# EAGLE board SparkFun_MIDI_Shield_Panel_v15 (EAGLE 7.3.0)
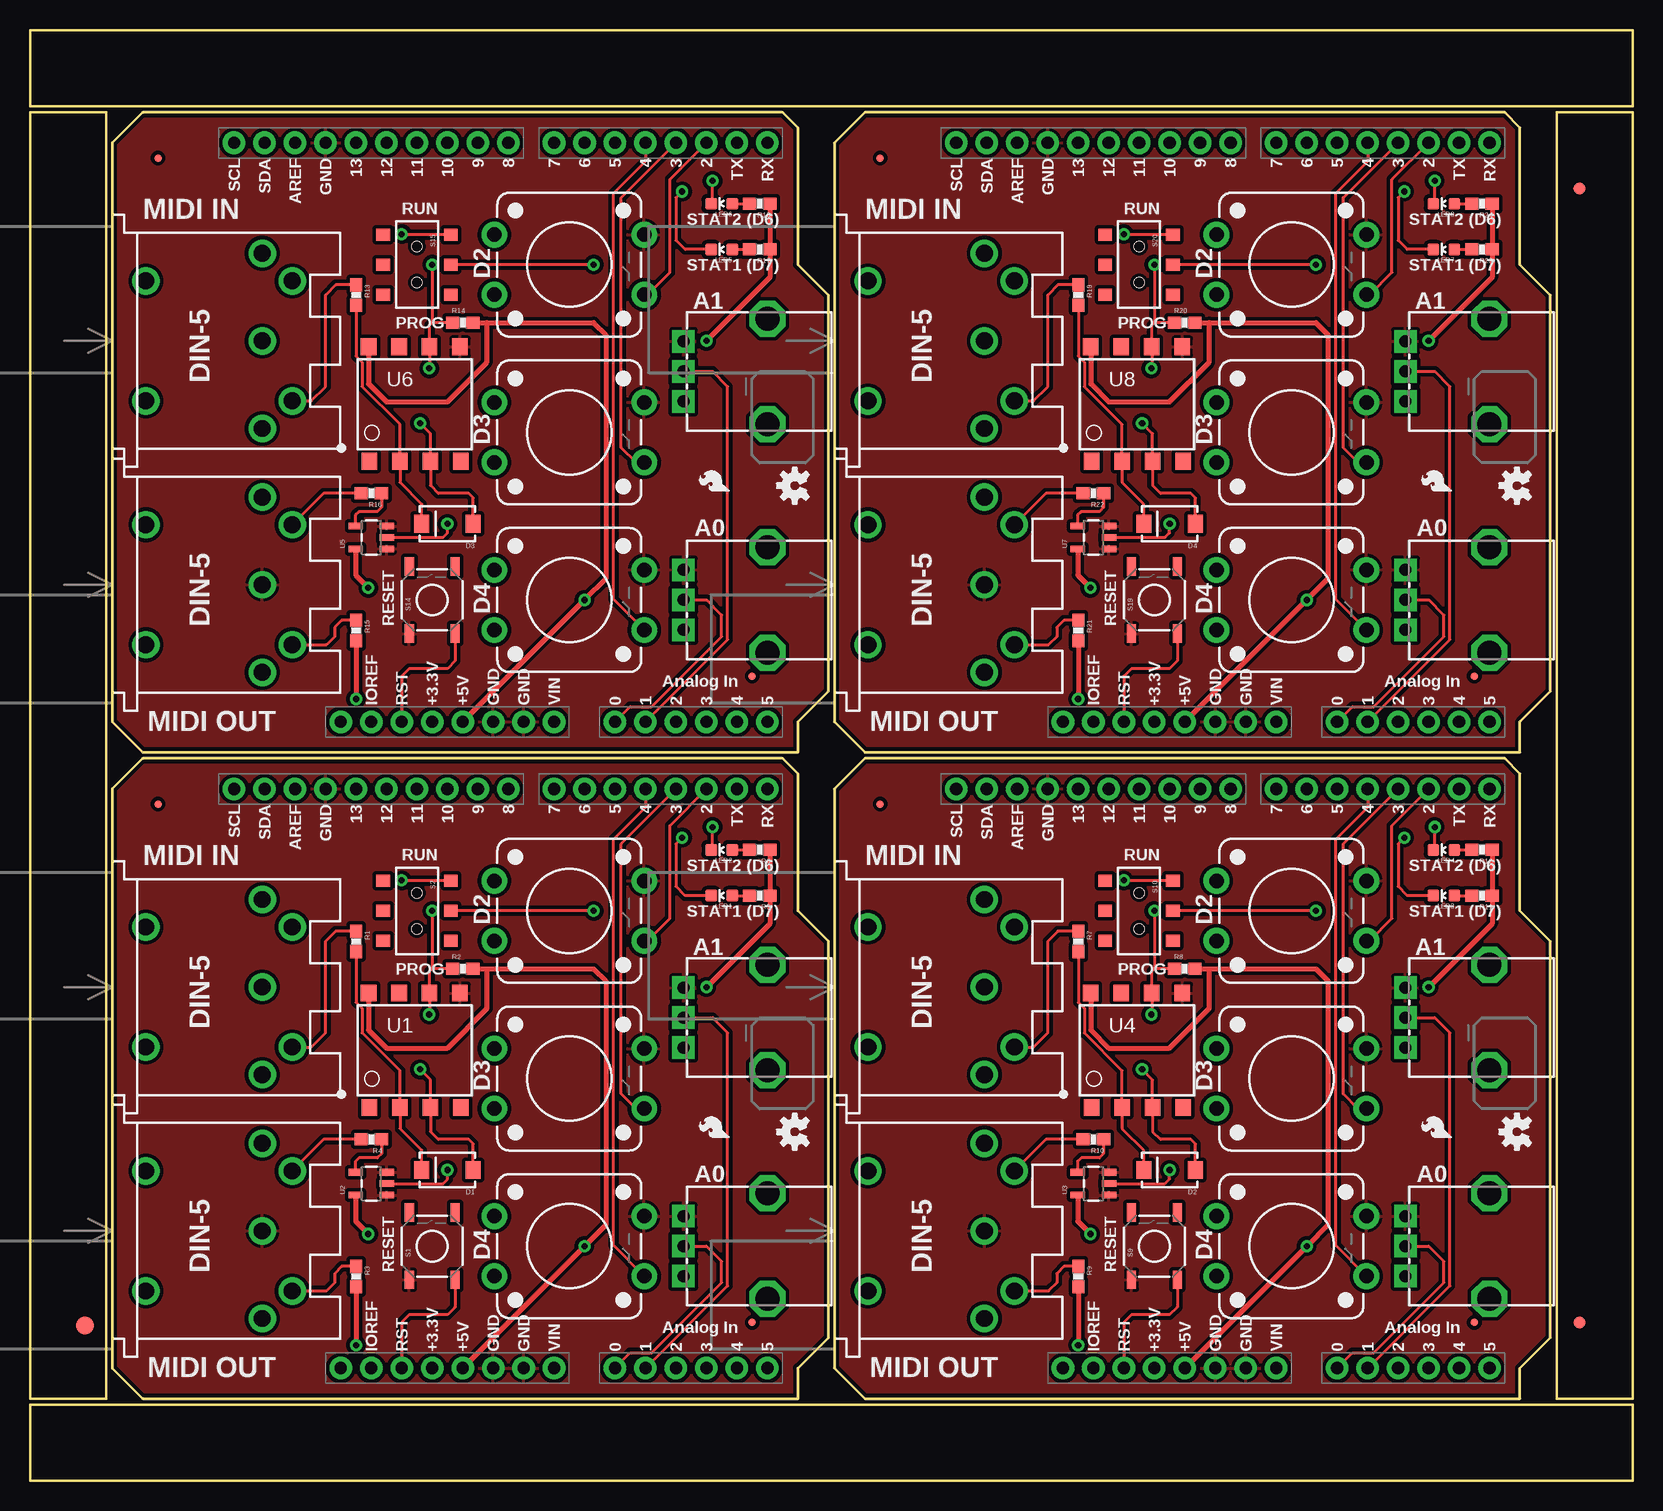
[diagram p0: board, top side]
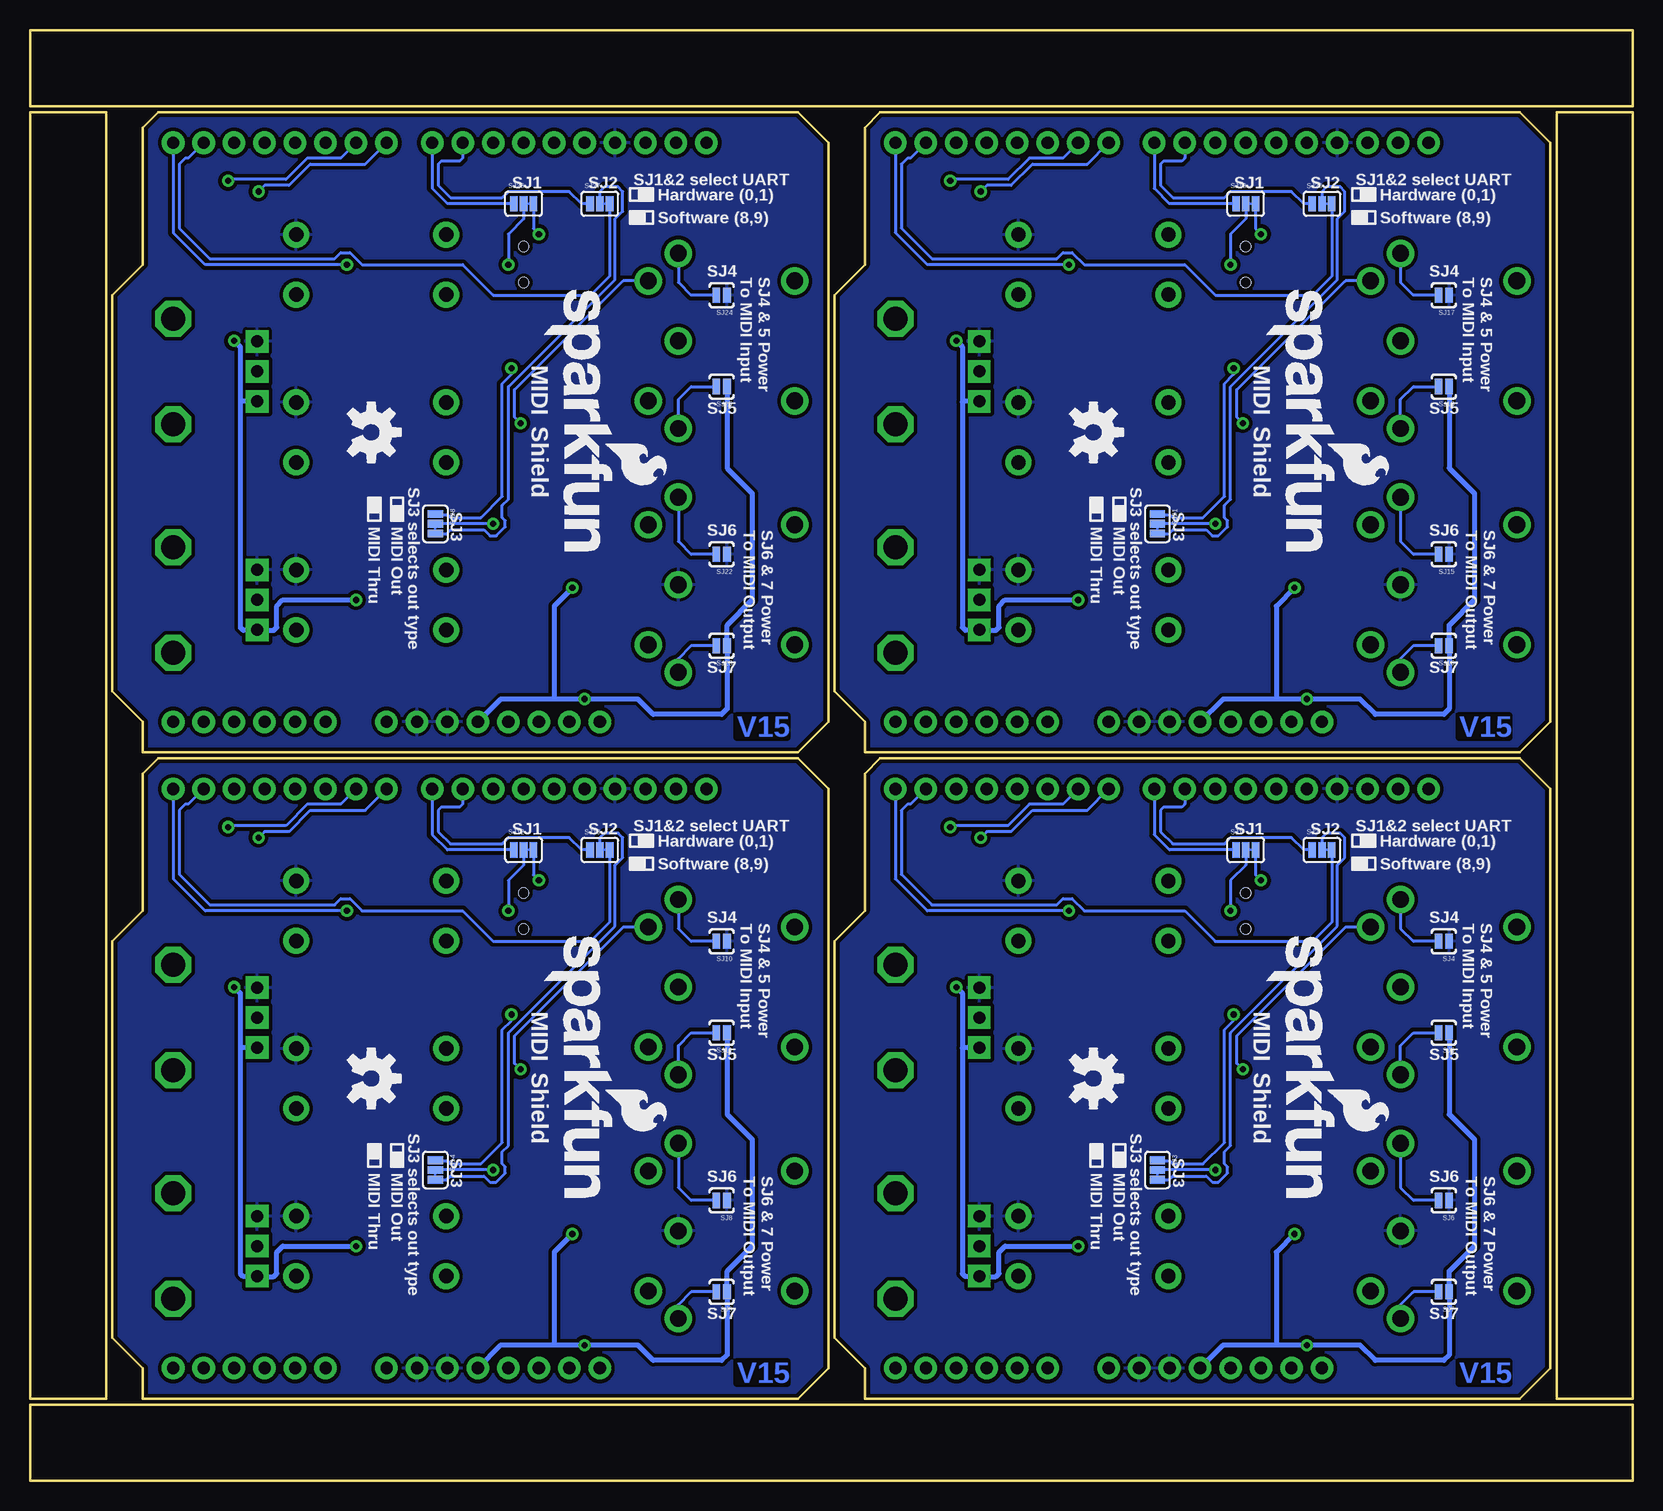
[diagram p1: board, bottom side, seen from below]

Size 133.6 x 120.9 mm. Coordinates in mm from the lower left corner, seen from the top.
Outline: 6.86,9.4 6.86,57.66 9.4,60.2 62.74,60.2 64.01,58.93 64.01,47.5 66.55,44.96 66.55,11.94 64.01,9.4 64.01,6.86 9.4,6.86 6.86,9.4
Outline: 67.06,9.4 67.06,57.66 69.6,60.2 122.94,60.2 124.21,58.93 124.21,47.5 126.75,44.96 126.75,11.94 124.21,9.4 124.21,6.86 69.6,6.86 67.06,9.4
Outline: 6.86,63.25 6.86,111.51 9.4,114.05 62.74,114.05 64.01,112.78 64.01,101.35 66.55,98.81 66.55,65.79 64.01,63.25 64.01,60.71 9.4,60.71 6.86,63.25
Outline: 67.06,63.25 67.06,111.51 69.6,114.05 122.94,114.05 124.21,112.78 124.21,101.35 126.75,98.81 126.75,65.79 124.21,63.25 124.21,60.71 69.6,60.71 67.06,63.25
Outline: 6.35,6.86 6.35,114.05 0,114.05 0,6.86 6.35,6.86
Outline: 0,0 133.6,0 133.6,6.35 0,6.35 0,0
Outline: 133.6,6.86 133.6,114.05 127.25,114.05 127.25,6.86 133.6,6.86
Outline: 133.6,120.9 0,120.9 0,114.55 133.6,114.55 133.6,120.9
Copper layers (1+2*16): Top 0.035mm / dielectric 1.5mm / Route2 0.035mm / dielectric 0.15mm / Bottom 0.035mm
Design rules "SparkFun-2-layer *": minimum track width 7mil, minimum drill 15mil, track to track 8mil, track to pad 8mil, pad to pad 8mil, via to via 8mil, smd to smd 8mil, copper to edge 8mil, drill to drill 8mil, minimum pad ring 12mil, minimum via ring 10mil, stop-mask expansion 4mil, vias tented up to drill 20mil, thermal gap 10mil

## Footprints (pad centres in the part's own frame; a part is rotated, then mirrored left to right if it is on the bottom)
SMA-DIODE = smd 1.27 x 1.47: A -2.15,0; C 2.15,0
FIDUCIAL-1.5X3 = smd 1.5 x 1.5: 1 0,0
FIDUCIAL-1X2 = smd 1 x 1: 1 0,0
MICRO-FIDUCIAL = smd 0.635 x 0.635: 1 0,0
5-PIN-DIN-RA-PCB-NEW = drill 1.4 pad 2.286: 1 7.3,12.5; 2 0,12.5; 3 -7.3,12.5; 4 5,15; 5 -5,15; 6 -5,2.8; 7 5,2.8
UNO_R3_SHIELD = drill 1.016 pad 1.88: 3.3V 50.8,26.67; 5V 50.8,29.21; A0 50.8,41.91; A1 50.8,44.45; A2 50.8,46.99; A3 50.8,49.53; A4 50.8,52.07; A5 50.8,54.61; AREF 2.54,15.24; D2 2.54,49.53; D3 2.54,46.99; D4 2.54,44.45; D5 2.54,41.91; D6 2.54,39.37; D7 2.54,36.83; D8 2.54,33.02; D9 2.54,30.48; D10 2.54,27.94; D11 2.54,25.4; D12 2.54,22.86; D13 2.54,20.32; GND@0 50.8,31.75; GND@1 50.8,34.29; GND@2 2.54,17.78; IOREF 50.8,21.59; NC 50.8,19.05; RES 50.8,24.13; RX 2.54,54.61; SCL 2.54,10.16; SDA 2.54,12.7; TX 2.54,52.07; VIN 50.8,36.83
LED-0603 = smd 1 x 1: A 0,-0.877; C 0,0.877
0603-RES = smd 1.1 x 1: 1 -0.85,0; 2 0.85,0
ALPS_POT = drill 1 pad 1.88 square: P$1 7,-2.5; P$2 7,0; P$3 7,2.5 | drill 2 octagon: P$4 0,-4.4; P$5 0,4.4
TACTILE-SWITCH-SMD = smd 1.524 x 0.762: 1 -2.794,1.905; 2 2.794,1.905; 3 -2.794,-1.905; 4 2.794,-1.905
AYZ0202 = smd 1 x 1.15: 1 -2.5,2.825; 2 0,2.825; 3 2.5,2.825; 4 -2.5,-2.825; 5 0,-2.825; 6 2.5,-2.825 | hole 0.85: 1.5,0; -1.5,0
TACTILE-PTH-12MM = drill 1.2 pad 2.159: 1 6.25,-2.5; 2 -6.25,-2.5; 3 6.25,2.5; 4 -6.25,2.5
PAD-JUMPER-3-2OF3_NC_BY_TRACE_YES_SILK_FULL_BOX = smd 0.635 x 1.27: 1 -0.813,0; 2 0,0; 3 0.813,0
PAD-JUMPER-2-NO_YES_SILK = smd 0.635 x 1.27: 1 -0.45,0; 2 0.45,0
8-SMD = smd 1.3 x 1.4: 1 -3.96,-4.96; 2 -1.42,-4.96; 3 1.12,-4.96; 4 3.66,-4.96; 5 3.59,4.58; 6 1.05,4.58; 7 -1.49,4.58; 8 -4.03,4.58
SOT23-5 = smd 0.55 x 1.2: 1 -0.95,-1.3; 2 0,-1.3; 3 0.95,-1.3; 4 0.95,1.3; 5 -0.95,1.3

## Placement (x,y rotation side)
D1  MBRA140  [SMA-DIODE]  34.8,25.91 180 top
D2  MBRA140  [SMA-DIODE]  95,25.91 180 top
D3  MBRA140  [SMA-DIODE]  34.8,79.76 180 top
D4  MBRA140  [SMA-DIODE]  95,79.76 180 top
E$1  [FIDUCIAL-1.5X3]  4.57,12.95 0 top
E$4  [FIDUCIAL-1X2]  129.16,13.21 0 top
E$5  [FIDUCIAL-1X2]  129.16,107.7 180 top
FID1  FIDUCIALUFIDUCIAL  [MICRO-FIDUCIAL]  60.2,13.21 0 top
FID2  FIDUCIALUFIDUCIAL  [MICRO-FIDUCIAL]  10.67,56.39 0 top
FID3  FIDUCIALUFIDUCIAL  [MICRO-FIDUCIAL]  70.87,56.39 0 top
FID4  FIDUCIALUFIDUCIAL  [MICRO-FIDUCIAL]  120.4,13.21 0 top
FID5  FIDUCIALUFIDUCIAL  [MICRO-FIDUCIAL]  10.67,110.24 0 top
FID6  FIDUCIALUFIDUCIAL  [MICRO-FIDUCIAL]  60.2,67.06 0 top
FID7  FIDUCIALUFIDUCIAL  [MICRO-FIDUCIAL]  70.87,110.24 0 top
FID8  FIDUCIALUFIDUCIAL  [MICRO-FIDUCIAL]  120.4,67.06 0 top
J1  MIDI IN  [5-PIN-DIN-RA-PCB-NEW]  6.86,41.15 270 top
J2  MIDI OUT  [5-PIN-DIN-RA-PCB-NEW]  6.86,20.83 270 top
J3  UNO_R3_SHIELD  [UNO_R3_SHIELD]  6.86,60.2 270 top
J4  MIDI IN  [5-PIN-DIN-RA-PCB-NEW]  67.06,41.15 270 top
J5  MIDI OUT  [5-PIN-DIN-RA-PCB-NEW]  67.06,20.83 270 top
J6  UNO_R3_SHIELD  [UNO_R3_SHIELD]  67.06,60.2 270 top
J7  MIDI IN  [5-PIN-DIN-RA-PCB-NEW]  6.86,95 270 top
J8  MIDI OUT  [5-PIN-DIN-RA-PCB-NEW]  6.86,74.68 270 top
J9  UNO_R3_SHIELD  [UNO_R3_SHIELD]  6.86,114.05 270 top
J10  MIDI IN  [5-PIN-DIN-RA-PCB-NEW]  67.06,95 270 top
J11  MIDI OUT  [5-PIN-DIN-RA-PCB-NEW]  67.06,74.68 270 top
J12  UNO_R3_SHIELD  [UNO_R3_SHIELD]  67.06,114.05 270 top
LED1  RED  [LED-0603]  57.66,48.77 90 top
LED2  GREEN  [LED-0603]  57.66,52.58 90 top
LED3  RED  [LED-0603]  117.86,48.77 90 top
LED4  GREEN  [LED-0603]  117.86,52.58 90 top
LED5  RED  [LED-0603]  57.66,102.62 90 top
LED6  GREEN  [LED-0603]  57.66,106.43 90 top
LED7  RED  [LED-0603]  117.86,102.62 90 top
LED8  GREEN  [LED-0603]  117.86,106.43 90 top
LOGO1  SFE_LOGO_NAME_FLAME.2_INCH  [SFE_LOGO_NAME_FLAME_.2]  30.61,46.1 270 bottom
LOGO2  OSHW-LOGOS  [OSHW-LOGO-S]  63.75,29.08 90 top
LOGO3  OSHW-LOGOM  [OSHW-LOGO-M]  44.96,33.53 270 bottom
LOGO4  SFE_LOGO_NAME_FLAME.2_INCH  [SFE_LOGO_NAME_FLAME_.2]  90.81,46.1 270 bottom
LOGO5  SFE_LOGO_FLAME.1_INCH  [SFE_LOGO_FLAME_.1]  58.67,28.32 90 top
LOGO6  OSHW-LOGOS  [OSHW-LOGO-S]  123.95,29.08 90 top
LOGO7  OSHW-LOGOM  [OSHW-LOGO-M]  105.16,33.53 270 bottom
LOGO8  SFE_LOGO_FLAME.1_INCH  [SFE_LOGO_FLAME_.1]  118.87,28.32 90 top
LOGO9  SFE_LOGO_NAME_FLAME.2_INCH  [SFE_LOGO_NAME_FLAME_.2]  30.61,99.95 270 bottom
LOGO10  OSHW-LOGOS  [OSHW-LOGO-S]  63.75,82.93 90 top
LOGO11  OSHW-LOGOM  [OSHW-LOGO-M]  44.96,87.38 270 bottom
LOGO12  SFE_LOGO_FLAME.1_INCH  [SFE_LOGO_FLAME_.1]  58.67,82.17 90 top
LOGO13  SFE_LOGO_NAME_FLAME.2_INCH  [SFE_LOGO_NAME_FLAME_.2]  90.81,99.95 270 bottom
LOGO14  OSHW-LOGOS  [OSHW-LOGO-S]  123.95,82.93 90 top
LOGO15  OSHW-LOGOM  [OSHW-LOGO-M]  105.16,87.38 270 bottom
LOGO16  SFE_LOGO_FLAME.1_INCH  [SFE_LOGO_FLAME_.1]  118.87,82.17 90 top
R1  220  [0603-RES]  27.18,44.96 270 top
R2  220  [0603-RES]  36.07,42.67 0 top
R3  220  [0603-RES]  27.18,17.02 270 top
R4  220  [0603-RES]  28.45,28.45 180 top
R5  330  [0603-RES]  60.83,48.77 180 top
R6  330  [0603-RES]  60.83,52.58 180 top
R7  220  [0603-RES]  87.38,44.96 270 top
R8  220  [0603-RES]  96.27,42.67 0 top
R9  220  [0603-RES]  87.38,17.02 270 top
R10  220  [0603-RES]  88.65,28.45 180 top
R11  330  [0603-RES]  121.03,48.77 180 top
R12  330  [0603-RES]  121.03,52.58 180 top
R13  220  [0603-RES]  27.18,98.81 270 top
R14  220  [0603-RES]  36.07,96.52 0 top
R15  220  [0603-RES]  27.18,70.87 270 top
R16  220  [0603-RES]  28.45,82.3 180 top
R17  330  [0603-RES]  60.83,102.62 180 top
R18  330  [0603-RES]  60.83,106.43 180 top
R19  220  [0603-RES]  87.38,98.81 270 top
R20  220  [0603-RES]  96.27,96.52 0 top
R21  220  [0603-RES]  87.38,70.87 270 top
R22  220  [0603-RES]  88.65,82.3 180 top
R23  330  [0603-RES]  121.03,102.62 180 top
R24  330  [0603-RES]  121.03,106.43 180 top
RV1  10k  [ALPS_POT]  61.47,38.61 180 top
RV2  10k  [ALPS_POT]  61.47,19.56 180 top
RV3  10k  [ALPS_POT]  121.67,38.61 180 top
RV4  10k  [ALPS_POT]  121.67,19.56 180 top
RV5  10k  [ALPS_POT]  61.47,92.46 180 top
RV6  10k  [ALPS_POT]  61.47,73.41 180 top
RV7  10k  [ALPS_POT]  121.67,92.46 180 top
RV8  10k  [ALPS_POT]  121.67,73.41 180 top
S1  Reset  [TACTILE-SWITCH-SMD]  33.53,19.56 90 top
S2  RUN/PROGRAM  [AYZ0202]  32.26,47.5 270 top
S3  SWITCH-MOMENTARY-212MM  [TACTILE-PTH-12MM]  44.96,19.56 0 top
S4  SWITCH-MOMENTARY-212MM  [TACTILE-PTH-12MM]  44.96,33.53 0 top
S5  SWITCH-MOMENTARY-212MM  [TACTILE-PTH-12MM]  44.96,47.5 0 top
S6  SWITCH-MOMENTARY-212MM  [TACTILE-PTH-12MM]  105.16,19.56 0 top
S7  SWITCH-MOMENTARY-212MM  [TACTILE-PTH-12MM]  105.16,33.53 0 top
S8  SWITCH-MOMENTARY-212MM  [TACTILE-PTH-12MM]  105.16,47.5 0 top
S9  Reset  [TACTILE-SWITCH-SMD]  93.73,19.56 90 top
S10  RUN/PROGRAM  [AYZ0202]  92.46,47.5 270 top
S11  SWITCH-MOMENTARY-212MM  [TACTILE-PTH-12MM]  44.96,73.41 0 top
S12  SWITCH-MOMENTARY-212MM  [TACTILE-PTH-12MM]  44.96,87.38 0 top
S13  SWITCH-MOMENTARY-212MM  [TACTILE-PTH-12MM]  44.96,101.35 0 top
S14  Reset  [TACTILE-SWITCH-SMD]  33.53,73.41 90 top
S15  RUN/PROGRAM  [AYZ0202]  32.26,101.35 270 top
S16  SWITCH-MOMENTARY-212MM  [TACTILE-PTH-12MM]  105.16,73.41 0 top
S17  SWITCH-MOMENTARY-212MM  [TACTILE-PTH-12MM]  105.16,87.38 0 top
S18  SWITCH-MOMENTARY-212MM  [TACTILE-PTH-12MM]  105.16,101.35 0 top
S19  Reset  [TACTILE-SWITCH-SMD]  93.73,73.41 90 top
S20  RUN/PROGRAM  [AYZ0202]  92.46,101.35 270 top
SJ1  RX sel  [PAD-JUMPER-3-2OF3_NC_BY_TRACE_YES_SILK_FULL_BOX]  32.26,52.58 0 bottom
SJ2  TX sel  [PAD-JUMPER-3-2OF3_NC_BY_TRACE_YES_SILK_FULL_BOX]  25.91,52.58 0 bottom
SJ3  out/thru  [PAD-JUMPER-3-2OF3_NC_BY_TRACE_YES_SILK_FULL_BOX]  39.62,25.91 270 bottom
SJ4  JUMPER-PAD-2-NOYES_SILK  [PAD-JUMPER-2-NO_YES_SILK]  15.75,44.96 180 bottom
SJ5  JUMPER-PAD-2-NOYES_SILK  [PAD-JUMPER-2-NO_YES_SILK]  15.75,37.34 180 bottom
SJ6  JUMPER-PAD-2-NOYES_SILK  [PAD-JUMPER-2-NO_YES_SILK]  15.75,23.37 180 bottom
SJ7  JUMPER-PAD-2-NOYES_SILK  [PAD-JUMPER-2-NO_YES_SILK]  15.75,15.75 180 bottom
SJ8  JUMPER-PAD-2-NOYES_SILK  [PAD-JUMPER-2-NO_YES_SILK]  75.95,23.37 180 bottom
SJ9  JUMPER-PAD-2-NOYES_SILK  [PAD-JUMPER-2-NO_YES_SILK]  75.95,15.75 180 bottom
SJ10  JUMPER-PAD-2-NOYES_SILK  [PAD-JUMPER-2-NO_YES_SILK]  75.95,44.96 180 bottom
SJ11  JUMPER-PAD-2-NOYES_SILK  [PAD-JUMPER-2-NO_YES_SILK]  75.95,37.34 180 bottom
SJ12  RX sel  [PAD-JUMPER-3-2OF3_NC_BY_TRACE_YES_SILK_FULL_BOX]  92.46,52.58 0 bottom
SJ13  TX sel  [PAD-JUMPER-3-2OF3_NC_BY_TRACE_YES_SILK_FULL_BOX]  86.11,52.58 0 bottom
SJ14  out/thru  [PAD-JUMPER-3-2OF3_NC_BY_TRACE_YES_SILK_FULL_BOX]  99.82,25.91 270 bottom
SJ15  JUMPER-PAD-2-NOYES_SILK  [PAD-JUMPER-2-NO_YES_SILK]  15.75,77.22 180 bottom
SJ16  JUMPER-PAD-2-NOYES_SILK  [PAD-JUMPER-2-NO_YES_SILK]  15.75,69.6 180 bottom
SJ17  JUMPER-PAD-2-NOYES_SILK  [PAD-JUMPER-2-NO_YES_SILK]  15.75,98.81 180 bottom
SJ18  JUMPER-PAD-2-NOYES_SILK  [PAD-JUMPER-2-NO_YES_SILK]  15.75,91.19 180 bottom
SJ19  RX sel  [PAD-JUMPER-3-2OF3_NC_BY_TRACE_YES_SILK_FULL_BOX]  32.26,106.43 0 bottom
SJ20  TX sel  [PAD-JUMPER-3-2OF3_NC_BY_TRACE_YES_SILK_FULL_BOX]  25.91,106.43 0 bottom
SJ21  out/thru  [PAD-JUMPER-3-2OF3_NC_BY_TRACE_YES_SILK_FULL_BOX]  39.62,79.76 270 bottom
SJ22  JUMPER-PAD-2-NOYES_SILK  [PAD-JUMPER-2-NO_YES_SILK]  75.95,77.22 180 bottom
SJ23  JUMPER-PAD-2-NOYES_SILK  [PAD-JUMPER-2-NO_YES_SILK]  75.95,69.6 180 bottom
SJ24  JUMPER-PAD-2-NOYES_SILK  [PAD-JUMPER-2-NO_YES_SILK]  75.95,98.81 180 bottom
SJ25  JUMPER-PAD-2-NOYES_SILK  [PAD-JUMPER-2-NO_YES_SILK]  75.95,91.19 180 bottom
SJ26  RX sel  [PAD-JUMPER-3-2OF3_NC_BY_TRACE_YES_SILK_FULL_BOX]  92.46,106.43 0 bottom
SJ27  TX sel  [PAD-JUMPER-3-2OF3_NC_BY_TRACE_YES_SILK_FULL_BOX]  86.11,106.43 0 bottom
SJ28  out/thru  [PAD-JUMPER-3-2OF3_NC_BY_TRACE_YES_SILK_FULL_BOX]  99.82,79.76 270 bottom
U1  6N138M  [8-SMD]  32.26,36.07 0 top
U2  74AHC1G125  [SOT23-5]  28.45,24.77 90 top
U3  74AHC1G125  [SOT23-5]  88.65,24.77 90 top
U4  6N138M  [8-SMD]  92.46,36.07 0 top
U5  74AHC1G125  [SOT23-5]  28.45,78.61 90 top
U6  6N138M  [8-SMD]  32.26,89.92 0 top
U7  74AHC1G125  [SOT23-5]  88.65,78.61 90 top
U8  6N138M  [8-SMD]  92.46,89.92 0 top

## Library data of the parts
D1-D4 = SparkFun-DiscreteSemi; PROD_ID: DIO-08053
E$1 = SparkFun-Retired
E$4 E$5 FID1-FID8 LOGO1-LOGO16 = SparkFun-Aesthetics
J1 J2 J4 J5 J7 J8 J10 J11 = Testing; PROD_ID: CONN-09481
J3 J6 J9 J12 = SparkFun-Boards
LED1 LED3 LED5 LED7 = SparkFun-LED; PROD_ID: DIO-00819
LED2 LED4 LED6 LED8 = SparkFun-LED; PROD_ID: DIO-00821
R1-R4 R7-R10 R13-R16 R19-R22 = SparkFun-Resistors; PROD_ID: RES-07861
R5 R6 R11 R12 R17 R18 R23 R24 = SparkFun-Resistors; PROD_ID: RES-00818
RV1-RV8 = SparkFun-Electromechanical; PROD_ID: RES-09177
S1 S9 S14 S19 = SparkFun-Electromechanical; PROD_ID: SWCH-08247
S2 S10 S15 S20 = SparkFun-Electromechanical; PROD_ID: SWCH-08179
S3-S8 S11-S13 S16-S18 = SparkFun-Electromechanical; PROD_ID: SWCH-09185
SJ1-SJ28 = SparkFun-Passives
U1 U4 U6 U8 = SparkFun-DiscreteSemi; PROD_ID: IC-09482
U2 U3 U5 U7 = SparkFun-DigitalIC; PROD_ID: IC-11920

## Nets
1: D2.C R7.2 U4.2
2: J5.4 R9.1
3: D3.C R13.2 U6.2
4: J8.4 R15.1
5: D4.C R19.2 U8.2
6: J11.4 R21.1
56: D1.C R1.2 U1.2
1235: J2.4 R3.1
A0: J3.A0 RV2.P$2
A1: J3.A1 RV1.P$2
A2: J6.A1 RV3.P$2
A3: J6.A0 RV4.P$2
A4: J9.A1 RV5.P$2
A5: J9.A0 RV6.P$2
A6: J12.A1 RV7.P$2
A7: J12.A0 RV8.P$2
D1: J6.D2 S8.1
D2: J3.D2 S5.1
D3: J3.D3 S4.1
D4: J3.D4 S3.1
D5: J6.D3 S7.1
D6: J3.D6 LED2.C
D7: J3.D7 LED1.C
D8: J6.D4 S6.1
D9: J6.D7 LED3.C
D10: J6.D6 LED4.C
D11: J9.D2 S13.1
D12: J9.D3 S12.1
D13: J9.D4 S11.1
D14: J9.D7 LED5.C
D15: J9.D6 LED6.C
D16: J12.D2 S18.1
D17: J12.D3 S17.1
D18: J12.D4 S16.1
D19: J12.D7 LED7.C
D20: J12.D6 LED8.C
GND: J2.2 J3.GND@0 J3.GND@1 J3.GND@2 RV1.P$1 RV2.P$1 S1.1 S3.3 S4.3 S5.3 SJ4.1 SJ6.1 U1.5 U2.1 U2.3
GND1: J5.2 J6.GND@0 J6.GND@1 J6.GND@2 RV3.P$1 RV4.P$1 S6.3 S7.3 S8.3 S9.1 SJ8.1 SJ10.1 U3.1 U3.3 U4.5
GND2: J8.2 J9.GND@0 J9.GND@1 J9.GND@2 RV5.P$1 RV6.P$1 S11.3 S12.3 S13.3 S14.1 SJ15.1 SJ17.1 U5.1 U5.3 U6.5
GND3: J11.2 J12.GND@0 J12.GND@1 J12.GND@2 RV7.P$1 RV8.P$1 S16.3 S17.3 S18.3 S19.1 SJ22.1 SJ24.1 U7.1 U7.3 U8.5
HARD-RX: S2.1 SJ1.3
HARD-RX1: S10.1 SJ12.3
HARD-RX2: S15.1 SJ19.3
HARD-RX3: S20.1 SJ26.3
HARD-TX: J3.TX SJ2.3
HARD-TX1: J6.TX SJ13.3
HARD-TX2: J9.TX SJ20.3
HARD-TX3: J12.TX SJ27.3
N$1: J2.5 R4.2
N$2: J1.4 R1.1
N$3: R4.1 U2.4
N$4: J2.3 SJ6.2
N$5: J2.1 SJ7.2
N$6: J1.3 SJ4.2
N$7: J1.1 SJ5.2
N$8: LED3.A R11.2
N$9: LED1.A R5.2
N$10: LED2.A R6.2
N$11: LED4.A R12.2
N$12: J4.4 R7.1
N$13: J5.5 R10.2
N$14: R10.1 U3.4
N$15: J5.3 SJ8.2
N$16: J5.1 SJ9.2
N$17: J4.3 SJ10.2
N$18: J4.1 SJ11.2
N$19: LED5.A R17.2
N$20: LED6.A R18.2
N$21: J7.4 R13.1
N$22: J8.5 R16.2
N$23: R16.1 U5.4
N$24: J8.3 SJ15.2
N$25: J8.1 SJ16.2
N$26: J7.3 SJ17.2
N$27: J7.1 SJ18.2
N$28: LED7.A R23.2
N$29: LED8.A R24.2
N$30: J10.4 R19.1
N$31: J11.5 R22.2
N$32: R22.1 U7.4
N$33: J11.3 SJ22.2
N$34: J11.1 SJ23.2
N$35: J10.3 SJ24.2
N$36: J10.1 SJ25.2
PIN1: D2.A J4.5 U4.3
PIN2: D3.A J7.5 U6.3
PIN3: D4.A J10.5 U8.3
PIN5: D1.A J1.5 U1.3
PORT-RX: R2.1 SJ1.2 SJ3.1 U1.6
PORT-RX1: R8.1 SJ12.2 SJ14.1 U4.6
PORT-RX2: R14.1 SJ19.2 SJ21.1 U6.6
PORT-RX3: R20.1 SJ26.2 SJ28.1 U8.6
PORT-TX: SJ2.2 SJ3.3
PORT-TX1: SJ13.2 SJ14.3
PORT-TX2: SJ20.2 SJ21.3
PORT-TX3: SJ27.2 SJ28.3
RESET: J3.RES S1.3
RESET1: J6.RES S9.3
RESET2: J9.RES S14.3
RESET3: J12.RES S19.3
RX-I: J3.RX S2.2
RX-I1: J6.RX S10.2
RX-I2: J9.RX S15.2
RX-I3: J12.RX S20.2
SOFT-RX: J3.D8 SJ1.1
SOFT-RX1: J6.D8 SJ12.1
SOFT-RX2: J9.D8 SJ19.1
SOFT-RX3: J12.D8 SJ26.1
SOFT-TX: J3.D9 SJ2.1
SOFT-TX1: J6.D9 SJ13.1
SOFT-TX2: J9.D9 SJ20.1
SOFT-TX3: J12.D9 SJ27.1
TX-BUF: SJ3.2 U2.2
TX-BUF1: SJ14.2 U3.2
TX-BUF2: SJ21.2 U5.2
TX-BUF3: SJ28.2 U7.2
VCC: J3.5V R2.2 R3.2 R5.1 R6.1 RV1.P$3 RV2.P$3 SJ5.1 SJ7.1 U1.8 U2.5
VCC1: J6.5V R8.2 R9.2 R11.1 R12.1 RV3.P$3 RV4.P$3 SJ9.1 SJ11.1 U3.5 U4.8
VCC2: J9.5V R14.2 R15.2 R17.1 R18.1 RV5.P$3 RV6.P$3 SJ16.1 SJ18.1 U5.5 U6.8
VCC3: J12.5V R20.2 R21.2 R23.1 R24.1 RV7.P$3 RV8.P$3 SJ23.1 SJ25.1 U7.5 U8.8

## Tracks (layer width: path | path; a pad name or v marks a point on that pad's centre or on a via)
1
  Top 0.254: D2.C 92.85,27.55 91.04,29.36 U4.2 91.04,34.19 87.88,37.34 87.88,39.37 87.38,39.88 R7.2
2
  Top 0.254: J5.4 84.92,15.83 85.6,16.51 85.6,17.27 86.19,17.87 R9.1
3
  Top 0.254: D3.C 32.65,81.4 30.84,83.21 U6.2 30.84,88.03 27.69,91.19 27.69,93.22 27.18,93.73 R13.2
4
  Top 0.254: J8.4 24.72,69.68 25.4,70.36 25.4,71.12 26,71.72 R15.1
5
  Top 0.254: D4.C 92.85,81.4 91.04,83.21 U8.2 91.04,88.03 87.88,91.19 87.88,93.22 87.38,93.73 R19.2
6
  Top 0.254: J11.4 84.92,69.68 85.6,70.36 85.6,71.12 86.19,71.72 R21.1
56
  Top 0.254: D1.C 32.65,27.55 30.84,29.36 U1.2 30.84,34.19 27.69,37.34 27.69,39.37 27.18,39.88 R1.2
1235
  Top 0.254: J2.4 24.72,15.83 25.4,16.51 25.4,17.27 26,17.87 R3.1
A0
  Top 0.254: J3.A0 50.04,10.67 51.82,10.67 57.66,16.51 57.66,18.29 56.39,19.56 RV2.P$2
A1
  Top 0.254: J3.A1 58.17,16.26 58.17,37.34 56.9,38.61 RV1.P$2
A2
  Top 0.254: J6.A1 118.36,16.26 118.36,37.34 117.09,38.61 RV3.P$2
A3
  Top 0.254: J6.A0 110.24,10.67 112.01,10.67 117.86,16.51 117.86,18.29 116.59,19.56 RV4.P$2
A4
  Top 0.254: J9.A1 58.17,70.1 58.17,91.19 56.9,92.46 RV5.P$2
A5
  Top 0.254: J9.A0 50.04,64.52 51.82,64.52 57.66,70.36 57.66,72.14 56.39,73.41 RV6.P$2
A6
  Top 0.254: J12.A1 118.36,70.1 118.36,91.19 117.09,92.46 RV7.P$2
A7
  Top 0.254: J12.A0 110.24,64.52 112.01,64.52 117.86,70.36 117.86,72.14 116.59,73.41 RV8.P$2
D1
  Top 0.254: S8.1 111.67,45 113.54,46.86 113.54,54.61 J6.D2
D2
  Top 0.254: S5.1 51.48,45 53.34,46.86 53.34,54.61 J3.D2
D3
  Top 0.254: S4.1 50.51,31.03 49.28,32.26 49.28,53.09 J3.D3
D4
  Top 0.254: S3.1 48.64,19.62 48.64,53.47 51.31,56.13 J3.D4
D5
  Top 0.254: S7.1 110.7,31.03 109.47,32.26 109.47,53.09 J6.D3
D6  (via drill 0.51)
  Top 0.254: LED2.C 56.9,52.69 v56.9,54.48
  Bottom 0.254: J3.D6 47.5,56.39 50.29,56.39 52.07,54.61 56.9,54.61 v56.9,54.48
D7  (via drill 0.51)
  Top 0.254: v54.36,53.59 53.85,53.09 53.85,49.53 54.61,48.77 LED1.C
  Bottom 0.254: J3.D7 45.47,55.88 50.04,55.88 51.82,54.1 53.85,54.1 v54.36,53.59
D8
  Top 0.254: S6.1 108.84,19.62 108.84,53.47 111.51,56.13 J6.D4
D9  (via drill 0.51)
  Top 0.254: v114.55,53.59 114.05,53.09 114.05,49.53 114.81,48.77 LED3.C
  Bottom 0.254: J6.D7 105.66,55.88 110.24,55.88 112.01,54.1 114.05,54.1 v114.55,53.59
D10  (via drill 0.51)
  Top 0.254: LED4.C 117.09,52.69 v117.09,54.48
  Bottom 0.254: J6.D6 107.7,56.39 110.49,56.39 112.27,54.61 117.09,54.61 v117.09,54.48
D11
  Top 0.254: S13.1 51.48,98.85 53.34,100.71 53.34,108.46 J9.D2
D12
  Top 0.254: S12.1 50.51,84.88 49.28,86.11 49.28,106.93 J9.D3
D13
  Top 0.254: S11.1 48.64,73.47 48.64,107.31 51.31,109.98 J9.D4
D14  (via drill 0.51)
  Top 0.254: v54.36,107.44 53.85,106.93 53.85,103.38 54.61,102.62 LED5.C
  Bottom 0.254: J9.D7 45.47,109.73 50.04,109.73 51.82,107.95 53.85,107.95 v54.36,107.44
D15  (via drill 0.51)
  Top 0.254: LED6.C 56.9,106.54 v56.9,108.33
  Bottom 0.254: J9.D6 47.5,110.24 50.29,110.24 52.07,108.46 56.9,108.46 v56.9,108.33
D16
  Top 0.254: S18.1 111.67,98.85 113.54,100.71 113.54,108.46 J12.D2
D17
  Top 0.254: S17.1 110.7,84.88 109.47,86.11 109.47,106.93 J12.D3
D18
  Top 0.254: S16.1 108.84,73.47 108.84,107.31 111.51,109.98 J12.D4
D19  (via drill 0.51)
  Top 0.254: v114.55,107.44 114.05,106.93 114.05,103.38 114.81,102.62 LED7.C
  Bottom 0.254: J12.D7 105.66,109.73 110.24,109.73 112.01,107.95 114.05,107.95 v114.55,107.44
D20  (via drill 0.51)
  Top 0.254: LED8.C 117.09,106.54 v117.09,108.33
  Bottom 0.254: J12.D6 107.7,110.24 110.49,110.24 112.27,108.46 117.09,108.46 v117.09,108.33
GND
  pour Bottom (isolate 0.305): 6.86,57.66 9.4,60.2 62.74,60.2 64.01,58.93 64.01,47.5 66.55,44.96 66.55,11.94 64.01,9.4 64.01,6.86 9.4,6.86 6.86,9.4
  pour Top (isolate 0.305): 6.86,57.66 9.4,60.2 62.74,60.2 64.01,58.93 64.01,47.5 66.55,44.96 66.55,11.94 64.01,9.4 64.01,6.86 9.4,6.86 6.86,9.4
GND1
  pour Bottom (isolate 0.305): 67.06,57.66 69.6,60.2 122.94,60.2 124.21,58.93 124.21,47.5 126.75,44.96 126.75,11.94 124.21,9.4 124.21,6.86 69.6,6.86 67.06,9.4
  pour Top (isolate 0.305): 67.06,57.66 69.6,60.2 122.94,60.2 124.21,58.93 124.21,47.5 126.75,44.96 126.75,11.94 124.21,9.4 124.21,6.86 69.6,6.86 67.06,9.4
GND2
  pour Bottom (isolate 0.305): 6.86,111.51 9.4,114.05 62.74,114.05 64.01,112.78 64.01,101.35 66.55,98.81 66.55,65.79 64.01,63.25 64.01,60.71 9.4,60.71 6.86,63.25
  pour Top (isolate 0.305): 6.86,111.51 9.4,114.05 62.74,114.05 64.01,112.78 64.01,101.35 66.55,98.81 66.55,65.79 64.01,63.25 64.01,60.71 9.4,60.71 6.86,63.25
GND3
  pour Bottom (isolate 0.305): 67.06,111.51 69.6,114.05 122.94,114.05 124.21,112.78 124.21,101.35 126.75,98.81 126.75,65.79 124.21,63.25 124.21,60.71 69.6,60.71 67.06,63.25
  pour Top (isolate 0.305): 67.06,111.51 69.6,114.05 122.94,114.05 124.21,112.78 124.21,101.35 126.75,98.81 126.75,65.79 124.21,63.25 124.21,60.71 69.6,60.71 67.06,63.25
HARD-RX  (via drill 0.51)
  Top 0.254: S2.1 31.03,50 v30.99,50.04
  Bottom 0.254: SJ1.3 31.45,50.49 v30.99,50.04
HARD-RX1  (via drill 0.51)
  Top 0.254: S10.1 91.23,50 v91.19,50.04
  Bottom 0.254: SJ12.3 91.64,50.49 v91.19,50.04
HARD-RX2  (via drill 0.51)
  Top 0.254: S15.1 31.03,103.85 v30.99,103.89
  Bottom 0.254: SJ19.3 31.45,104.34 v30.99,103.89
HARD-RX3  (via drill 0.51)
  Top 0.254: S20.1 91.23,103.85 v91.19,103.89
  Bottom 0.254: SJ26.3 91.64,104.34 v91.19,103.89
HARD-TX
  Bottom 0.254: J3.TX 60.2,56.39 60.45,56.39 60.96,55.88 60.96,50.55 58.42,48.01 48.01,48.01 47.5,48.51 46.74,48.51 45.72,47.5 37.34,47.5 34.8,44.96 26.67,44.96 25.09,46.53 SJ2.3
HARD-TX1
  Bottom 0.254: J6.TX 120.4,56.39 120.65,56.39 121.16,55.88 121.16,50.55 118.62,48.01 108.2,48.01 107.7,48.51 106.93,48.51 105.92,47.5 97.54,47.5 95,44.96 86.87,44.96 85.29,46.53 SJ13.3
HARD-TX2
  Bottom 0.254: J9.TX 60.2,110.24 60.45,110.24 60.96,109.73 60.96,104.39 58.42,101.85 48.01,101.85 47.5,102.36 46.74,102.36 45.72,101.35 37.34,101.35 34.8,98.81 26.67,98.81 25.09,100.38 SJ20.3
HARD-TX3
  Bottom 0.254: J12.TX 120.4,110.24 120.65,110.24 121.16,109.73 121.16,104.39 118.62,101.85 108.2,101.85 107.7,102.36 106.93,102.36 105.92,101.35 97.54,101.35 95,98.81 86.87,98.81 85.29,100.38 SJ27.3
N$1
  Top 0.254: R4.2 24.48,28.45 J2.5
N$2
  Top 0.254: J1.4 23.45,36.15 24.64,37.34 24.64,44.96 25.49,45.81 R1.1
N$3
  Top 0.254: U2.4 27.15,26.64 27.43,26.92 28.96,26.92 29.3,27.27 R4.1
N$4
  Bottom 0.254: SJ6.2 18.29,23.37 19.36,24.44 J2.3
N$5
  Bottom 0.254: SJ7.2 18.29,15.75 19.36,14.68 J2.1
N$6
  Bottom 0.254: SJ4.2 18.29,44.96 19.36,46.03 J1.3
N$7
  Bottom 0.254: SJ5.2 18.29,37.34 19.36,36.27 J1.1
N$8
  Top 0.254: LED3.A R11.2
N$9
  Top 0.254: LED1.A R5.2
N$10
  Top 0.254: LED2.A R6.2
N$11
  Top 0.254: LED4.A R12.2
N$12
  Top 0.254: J4.4 83.65,36.15 84.84,37.34 84.84,44.96 85.69,45.81 R7.1
N$13
  Top 0.254: R10.2 84.68,28.45 J5.5
N$14
  Top 0.254: U3.4 87.35,26.64 87.63,26.92 89.15,26.92 89.5,27.27 R10.1
N$15
  Bottom 0.254: SJ8.2 78.49,23.37 79.56,24.44 J5.3
N$16
  Bottom 0.254: SJ9.2 78.49,15.75 79.56,14.68 J5.1
N$17
  Bottom 0.254: SJ10.2 78.49,44.96 79.56,46.03 J4.3
N$18
  Bottom 0.254: SJ11.2 78.49,37.34 79.56,36.27 J4.1
N$19
  Top 0.254: LED5.A R17.2
N$20
  Top 0.254: LED6.A R18.2
N$21
  Top 0.254: J7.4 23.45,90 24.64,91.19 24.64,98.81 25.49,99.66 R13.1
N$22
  Top 0.254: R16.2 24.48,82.3 J8.5
N$23
  Top 0.254: U5.4 27.15,80.49 27.43,80.77 28.96,80.77 29.3,81.11 R16.1
N$24
  Bottom 0.254: SJ15.2 18.29,77.22 19.36,78.29 J8.3
N$25
  Bottom 0.254: SJ16.2 18.29,69.6 19.36,68.53 J8.1
N$26
  Bottom 0.254: SJ17.2 18.29,98.81 19.36,99.88 J7.3
N$27
  Bottom 0.254: SJ18.2 18.29,91.19 19.36,90.12 J7.1
N$28
  Top 0.254: LED7.A R23.2
N$29
  Top 0.254: LED8.A R24.2
N$30
  Top 0.254: J10.4 83.65,90 84.84,91.19 84.84,98.81 85.69,99.66 R19.1
N$31
  Top 0.254: R22.2 84.68,82.3 J11.5
N$32
  Top 0.254: U7.4 87.35,80.49 87.63,80.77 89.15,80.77 89.5,81.11 R22.1
N$33
  Bottom 0.254: SJ22.2 78.49,77.22 79.56,78.29 J11.3
N$34
  Bottom 0.254: SJ23.2 78.49,69.6 79.56,68.53 J11.1
N$35
  Bottom 0.254: SJ24.2 78.49,98.81 79.56,99.88 J10.3
N$36
  Bottom 0.254: SJ25.2 78.49,91.19 79.56,90.12 J10.1
PIN1  (via drill 0.51)
  Top 0.254: v92.71,34.29 93.58,33.42 U4.3 93.58,29.11 94.23,28.45 96.77,28.45 97.15,28.08 D2.A
  Bottom 0.254: v92.71,34.29 93.22,34.8 93.22,37.08 84.15,46.15 J4.5
PIN2  (via drill 0.51)
  Top 0.254: v32.51,88.14 33.38,87.27 U6.3 33.38,82.95 34.04,82.3 36.58,82.3 36.95,81.92 D3.A
  Bottom 0.254: v32.51,88.14 33.02,88.65 33.02,90.93 23.96,100 J7.5
PIN3  (via drill 0.51)
  Top 0.254: v92.71,88.14 93.58,87.27 U8.3 93.58,82.95 94.23,82.3 96.77,82.3 97.15,81.92 D4.A
  Bottom 0.254: v92.71,88.14 93.22,88.65 93.22,90.93 84.15,100 J10.5
PIN5  (via drill 0.51)
  Top 0.254: v32.51,34.29 33.38,33.42 U1.3 33.38,29.11 34.04,28.45 36.58,28.45 36.95,28.08 D1.A
  Bottom 0.254: v32.51,34.29 33.02,34.8 33.02,37.08 23.96,46.15 J1.5
PORT-RX  (via drill 0.51)
  Top 0.254: R2.1 33.53,42.67 | v33.53,47.5 33.53,42.67 | v33.27,38.86 33.31,38.9 U1.6 33.31,42.45 33.53,42.67
  Bottom 0.254: SJ1.2 32.26,51.31 33.53,50.04 v33.53,47.5 | SJ3.1 39.62,26.67 38.61,26.67 38.35,26.42 35.81,26.42 34.04,28.19 34.04,37.59 33.27,38.35 v33.27,38.86
PORT-RX1  (via drill 0.51)
  Top 0.254: R8.1 93.73,42.67 | v93.73,47.5 93.73,42.67 | v93.47,38.86 93.51,38.9 U4.6 93.51,42.45 93.73,42.67
  Bottom 0.254: SJ12.2 92.46,51.31 93.73,50.04 v93.73,47.5 | SJ14.1 99.82,26.67 98.81,26.67 98.55,26.42 96.01,26.42 94.23,28.19 94.23,37.59 93.47,38.35 v93.47,38.86
PORT-RX2  (via drill 0.51)
  Top 0.254: R14.1 33.53,96.52 | v33.53,101.35 33.53,96.52 | v33.27,92.71 33.31,92.74 U6.6 33.31,96.3 33.53,96.52
  Bottom 0.254: SJ19.2 32.26,105.16 33.53,103.89 v33.53,101.35 | SJ21.1 39.62,80.52 38.61,80.52 38.35,80.26 35.81,80.26 34.04,82.04 34.04,91.44 33.27,92.2 v33.27,92.71
PORT-RX3  (via drill 0.51)
  Top 0.254: R20.1 93.73,96.52 | v93.73,101.35 93.73,96.52 | v93.47,92.71 93.51,92.74 U8.6 93.51,96.3 93.73,96.52
  Bottom 0.254: SJ26.2 92.46,105.16 93.73,103.89 v93.73,101.35 | SJ28.1 99.82,80.52 98.81,80.52 98.55,80.26 96.01,80.26 94.23,82.04 94.23,91.44 93.47,92.2 v93.47,92.71
PORT-TX
  Bottom 0.254: SJ2.2 25.91,53.59 25.53,53.98 24.38,53.98 24,53.59 24,51.94 24.64,51.31 24.64,46.23 33.53,37.34 33.53,27.94 34.04,27.43 34.04,26.42 33.78,26.16 33.78,25.65 34.54,24.89 35.05,24.89 35.56,25.4 38.35,25.4 38.66,25.09 SJ3.3
PORT-TX1
  Bottom 0.254: SJ13.2 86.11,53.59 85.72,53.98 84.58,53.98 84.2,53.59 84.2,51.94 84.84,51.31 84.84,46.23 93.73,37.34 93.73,27.94 94.23,27.43 94.23,26.42 93.98,26.16 93.98,25.65 94.74,24.89 95.25,24.89 95.76,25.4 98.55,25.4 98.86,25.09 SJ14.3
PORT-TX2
  Bottom 0.254: SJ20.2 25.91,107.44 25.53,107.82 24.38,107.82 24,107.44 24,105.79 24.64,105.16 24.64,100.08 33.53,91.19 33.53,81.79 34.04,81.28 34.04,80.26 33.78,80.01 33.78,79.5 34.54,78.74 35.05,78.74 35.56,79.25 38.35,79.25 38.66,78.94 SJ21.3
PORT-TX3
  Bottom 0.254: SJ27.2 86.11,107.44 85.72,107.82 84.58,107.82 84.2,107.44 84.2,105.79 84.84,105.16 84.84,100.08 93.73,91.19 93.73,81.79 94.23,81.28 94.23,80.26 93.98,80.01 93.98,79.5 94.74,78.74 95.25,78.74 95.76,79.25 98.55,79.25 98.86,78.94 SJ28.3
RESET
  Top 0.254: J3.RES 30.99,13.21 31.62,13.84 34.8,13.84 35.43,14.48 S1.3
RESET1
  Top 0.254: J6.RES 91.19,13.21 91.82,13.84 95,13.84 95.63,14.48 S9.3
RESET2
  Top 0.254: J9.RES 30.99,67.06 31.62,67.69 34.8,67.69 35.43,68.33 S14.3
RESET3
  Top 0.254: J12.RES 91.19,67.06 91.82,67.69 95,67.69 95.63,68.33 S19.3
RX-I  (via drill 0.51)
  Top 0.254: v46.99,47.5 S2.2
  Bottom 0.254: v46.99,47.5 58.8,47.5 61.47,50.16 J3.RX
RX-I1  (via drill 0.51)
  Top 0.254: v107.19,47.5 S10.2
  Bottom 0.254: v107.19,47.5 119,47.5 121.67,50.16 J6.RX
RX-I2  (via drill 0.51)
  Top 0.254: v46.99,101.35 S15.2
  Bottom 0.254: v46.99,101.35 58.8,101.35 61.47,104.01 J9.RX
RX-I3  (via drill 0.51)
  Top 0.254: v107.19,101.35 S20.2
  Bottom 0.254: v107.19,101.35 119,101.35 121.67,104.01 J12.RX
SOFT-RX
  Bottom 0.254: J3.D8 39.88,53.85 38.61,52.58 SJ1.1
SOFT-RX1
  Bottom 0.254: J6.D8 100.08,53.85 98.81,52.58 SJ12.1
SOFT-RX2
  Bottom 0.254: J9.D8 39.88,107.7 38.61,106.43 SJ19.1
SOFT-RX3
  Bottom 0.254: J12.D8 100.08,107.7 98.81,106.43 SJ26.1
SOFT-TX
  Bottom 0.254: J3.D9 37.34,56.39 37.59,56.13 39.12,56.13 39.37,55.88 39.37,54.1 38.35,53.09 34.04,53.09 33.53,53.59 28.45,53.59 27.43,52.58 SJ2.1
SOFT-TX1
  Bottom 0.254: J6.D9 97.54,56.39 97.79,56.13 99.31,56.13 99.57,55.88 99.57,54.1 98.55,53.09 94.23,53.09 93.73,53.59 88.65,53.59 87.63,52.58 SJ13.1
SOFT-TX2
  Bottom 0.254: J9.D9 37.34,110.24 37.59,109.98 39.12,109.98 39.37,109.73 39.37,107.95 38.35,106.93 34.04,106.93 33.53,107.44 28.45,107.44 27.43,106.43 SJ20.1
SOFT-TX3
  Bottom 0.254: J12.D9 97.54,110.24 97.79,109.98 99.31,109.98 99.57,109.73 99.57,107.95 98.55,106.93 94.23,106.93 93.73,107.44 88.65,107.44 87.63,106.43 SJ27.1
TX-BUF  (via drill 0.51)
  Top 0.254: U2.2 34.42,24.77 34.8,25.15 v34.8,25.91
  Bottom 0.254: v34.8,25.91 SJ3.2
TX-BUF1  (via drill 0.51)
  Top 0.254: U3.2 94.61,24.77 95,25.15 v95,25.91
  Bottom 0.254: v95,25.91 SJ14.2
TX-BUF2  (via drill 0.51)
  Top 0.254: U5.2 34.42,78.61 34.8,78.99 v34.8,79.76
  Bottom 0.254: v34.8,79.76 SJ21.2
TX-BUF3  (via drill 0.51)
  Top 0.254: U7.2 94.61,78.61 95,78.99 v95,79.76
  Bottom 0.254: v95,79.76 SJ28.2
VCC  (via drill 0.51)
  Top 0.406: R6.1 R5.1 61.68,46.44 v56.39,41.15 | J3.5V v46.23,19.56 48.01,21.34 48.01,41.66 46.99,42.67 38.1,42.67 | R2.2 38.1,42.67 | U1.8 28.23,37.56 29.72,36.07 34.8,36.07 38.1,39.37 38.1,42.67 | U2.5 27.15,21.62 v28.19,20.57 | R3.2 v27.18,11.3
  Bottom 0.406: 29.72,11.3 v27.18,11.3 22.73,11.3 21.46,10.03 15.75,10.03 15.3,10.48 SJ7.1 15.3,17.47 13.21,19.56 13.21,28.45 15.3,30.54 SJ5.1 | 29.72,11.3 34.16,11.3 J3.5V | 29.72,11.3 29.72,19.05 v28.19,20.57 | v56.39,41.15 55.88,40.64 55.88,36.07 | 55.88,36.07 55.88,17.27 55.63,17.02 54.51,17.02 RV2.P$3 54.43,17.02 53.09,17.02 52.83,17.27 52.83,19.05 52.32,19.56 v46.23,19.56 | RV1.P$3 55.84,36.11 55.88,36.07
VCC1  (via drill 0.51)
  Top 0.406: R12.1 R11.1 121.88,46.44 v116.59,41.15 | J6.5V v106.43,19.56 108.2,21.34 108.2,41.66 107.19,42.67 98.3,42.67 | R8.2 98.3,42.67 | U4.8 88.43,37.56 89.92,36.07 95,36.07 98.3,39.37 98.3,42.67 | U3.5 87.35,21.62 v88.39,20.57 | R9.2 v87.38,11.3
  Bottom 0.406: 89.92,11.3 v87.38,11.3 82.93,11.3 81.66,10.03 75.95,10.03 75.5,10.48 SJ9.1 75.5,17.47 73.41,19.56 73.41,28.45 75.5,30.54 SJ11.1 | 89.92,11.3 94.36,11.3 J6.5V | 89.92,11.3 89.92,19.05 v88.39,20.57 | v116.59,41.15 116.08,40.64 116.08,36.07 | 116.08,36.07 116.08,17.27 115.82,17.02 114.71,17.02 RV4.P$3 114.63,17.02 113.28,17.02 113.03,17.27 113.03,19.05 112.52,19.56 v106.43,19.56 | RV3.P$3 116.04,36.11 116.08,36.07
VCC2  (via drill 0.51)
  Top 0.406: R18.1 R17.1 61.68,100.29 v56.39,95 | J9.5V v46.23,73.41 48.01,75.18 48.01,95.5 46.99,96.52 38.1,96.52 | R14.2 38.1,96.52 | U6.8 28.23,91.41 29.72,89.92 34.8,89.92 38.1,93.22 38.1,96.52 | U5.5 27.15,75.47 v28.19,74.42 | R15.2 v27.18,65.15
  Bottom 0.406: 29.72,65.15 v27.18,65.15 22.73,65.15 21.46,63.88 15.75,63.88 15.3,64.33 SJ16.1 15.3,71.32 13.21,73.41 13.21,82.3 15.3,84.39 SJ18.1 | 29.72,65.15 34.16,65.15 J9.5V | 29.72,65.15 29.72,72.9 v28.19,74.42 | v56.39,95 55.88,94.49 55.88,89.92 | 55.88,89.92 55.88,71.12 55.63,70.87 54.51,70.87 RV6.P$3 54.43,70.87 53.09,70.87 52.83,71.12 52.83,72.9 52.32,73.41 v46.23,73.41 | RV5.P$3 55.84,89.96 55.88,89.92
VCC3  (via drill 0.51)
  Top 0.406: R24.1 R23.1 121.88,100.29 v116.59,95 | J12.5V v106.43,73.41 108.2,75.18 108.2,95.5 107.19,96.52 98.3,96.52 | R20.2 98.3,96.52 | U8.8 88.43,91.41 89.92,89.92 95,89.92 98.3,93.22 98.3,96.52 | U7.5 87.35,75.47 v88.39,74.42 | R21.2 v87.38,65.15
  Bottom 0.406: 89.92,65.15 v87.38,65.15 82.93,65.15 81.66,63.88 75.95,63.88 75.5,64.33 SJ23.1 75.5,71.32 73.41,73.41 73.41,82.3 75.5,84.39 SJ25.1 | 89.92,65.15 94.36,65.15 J12.5V | 89.92,65.15 89.92,72.9 v88.39,74.42 | v116.59,95 116.08,94.49 116.08,89.92 | 116.08,89.92 116.08,71.12 115.82,70.87 114.71,70.87 RV8.P$3 114.63,70.87 113.28,70.87 113.03,71.12 113.03,72.9 112.52,73.41 v106.43,73.41 | RV7.P$3 116.04,89.96 116.08,89.92

## Text on the board
Bottom: V15 | V15 | V15 | V15
tPlace: RUN | RUN | MIDI IN | STAT2 (D6) | MIDI IN | STAT2 (D6) | STAT1 (D7) | STAT1 (D7) | D2 | D2 | A1 | A1 | PROG | PROG | D3 | D3 | A0 | A0 | D4 | D4 | RESET | RESET | MIDI OUT | MIDI OUT | RUN | RUN | MIDI IN | STAT2 (D6) | MIDI IN | STAT2 (D6) | STAT1 (D7) | STAT1 (D7) | D2 | D2 | A1 | A1 | PROG | PROG | D3 | D3 | A0 | A0 | D4 | D4 | RESET | RESET | MIDI OUT | MIDI OUT
bPlace: SJ1&2 select UART | SJ2 | SJ1 | SJ1&2 select UART | SJ2 | SJ1 | Hardware (0,1) | Hardware (0,1) | Software (8,9) | Software (8,9) | SJ4 | SJ4 | SJ4 & 5 Power / To MIDI Input | SJ4 & 5 Power / To MIDI Input | MIDI | MIDI | SJ5 | SJ5 | Shield | Shield | SJ3 selects out type | SJ3 selects out type | SJ6 | SJ3 | MIDI Out | MIDI Thru | SJ6 | SJ3 | MIDI Out | MIDI Thru | SJ6 & 7 Power / To MIDI Output | SJ6 & 7 Power / To MIDI Output | SJ7 | SJ7 | SJ1&2 select UART | SJ2 | SJ1 | SJ1&2 select UART | SJ2 | SJ1 | Hardware (0,1) | Hardware (0,1) | Software (8,9) | Software (8,9) | SJ4 | SJ4 | SJ4 & 5 Power / To MIDI Input | SJ4 & 5 Power / To MIDI Input | MIDI | MIDI | SJ5 | SJ5 | Shield | Shield | SJ3 selects out type | SJ3 selects out type | SJ6 | SJ3 | MIDI Out | MIDI Thru | SJ6 | SJ3 | MIDI Out | MIDI Thru | SJ6 & 7 Power / To MIDI Output | SJ6 & 7 Power / To MIDI Output | SJ7 | SJ7